# Altium PCB PCB_CONTROL.PcbDoc (part 14 of 15)
Units mil, origin at the board's own origin, x right, y up, seen from the top; angles counter-clockwise.
Board outline 7360.03 x 4773.15 mil, 2 copper layers (Top Layer, Bottom Layer); 73 components, 135 nets, 396 pads, 106 vias.
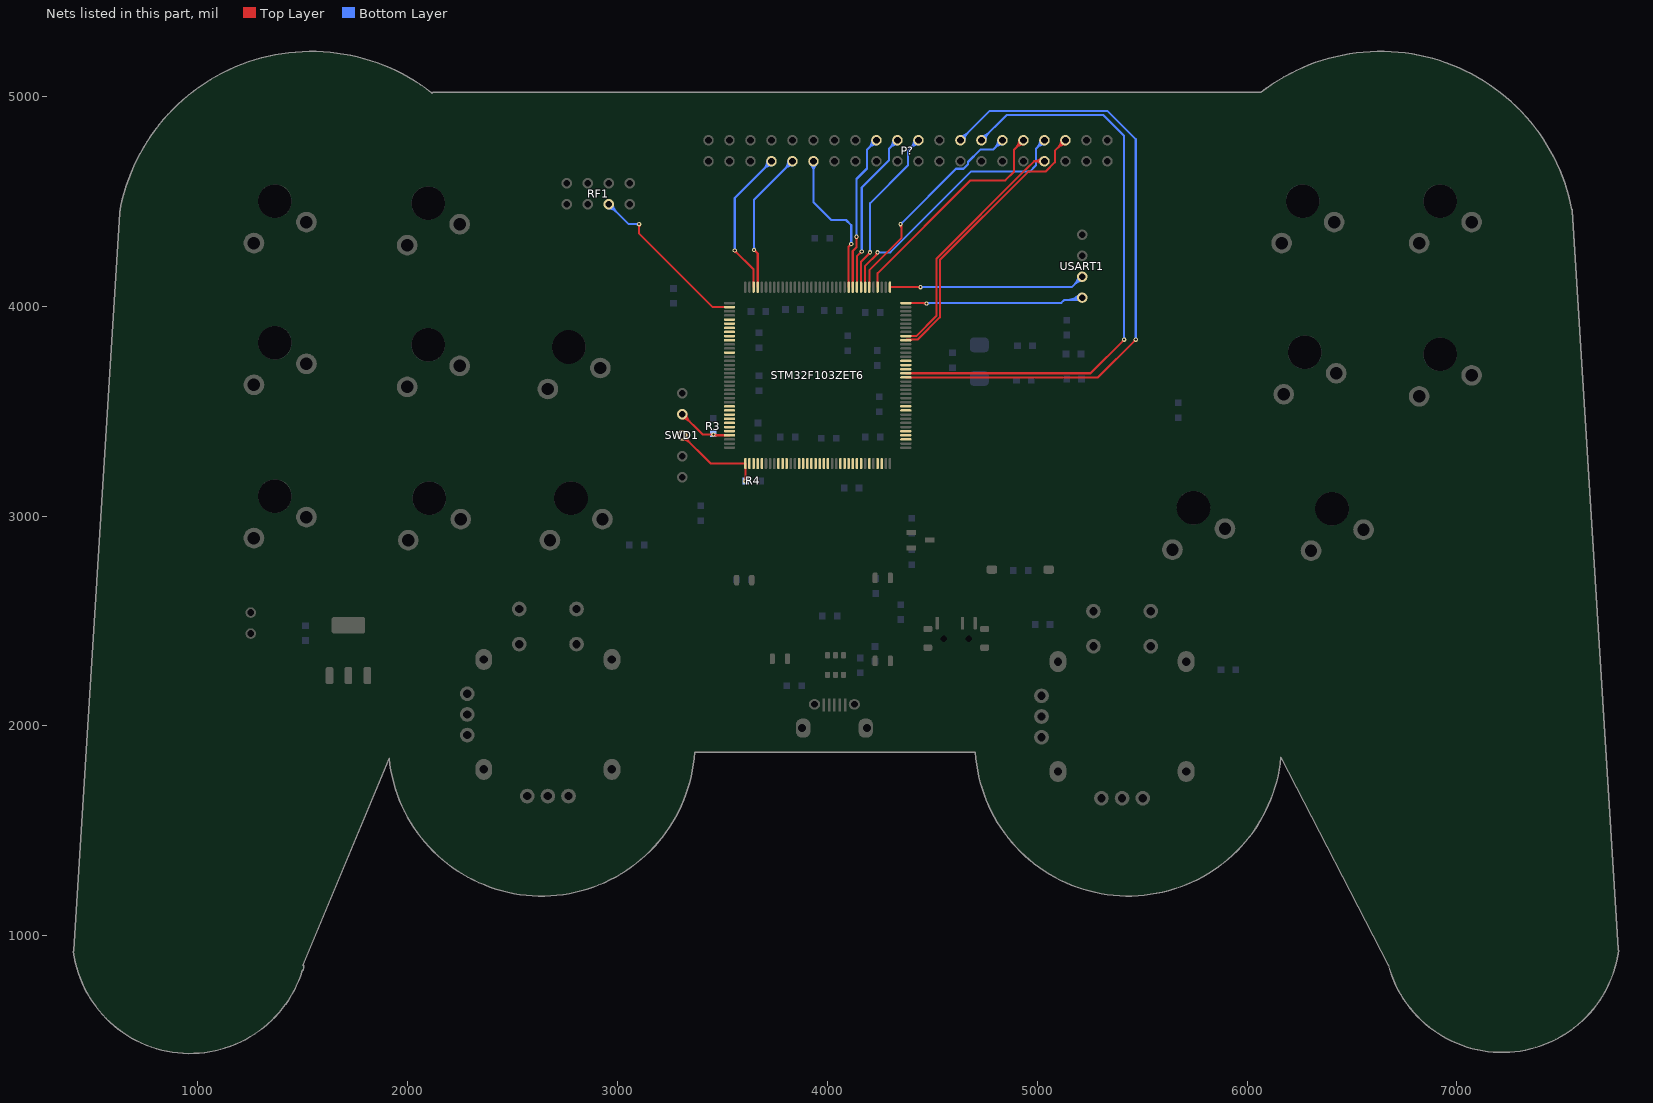
[diagram p14: the nets of this part, all layers, seen from the top]

## Via types
v1: diameter 20, hole 10, Top Layer to Bottom Layer, 104 vias
v2: diameter 30, hole 20, Top Layer to Bottom Layer, 2 vias

## Nets (pads, with @x,y where several pads share a name; then routed paths per layer and width w, separated by ;. In a path a pad name is that pad's centre, name@x,y a point inside that pad or via, vN(x,y) a via of type N, cw(c..) or ccw(c..) an arc to the next point about the centre after c; other vN are vias at no path point) (continued)
PA2: STM32F103ZET6.36 USART1.4 | length 2233.3
  Top Layer w10: STM32F103ZET6.36@4375,4014.49 v1@4471.51,4014.49 ; STM32F103ZET6.36@4396,4014.49 4432,4014.49 ; STM32F103ZET6.36@4396,4014.49 4432,4014.49 ; STM32F103ZET6.36@4396,4014.49 4432,4014.49 ; 4455.92,4014.49 cw(c4455.92,3993.92) v1@4470.46,4008.46 ; 4455.92,4014.49 cw(c4455.92,3993.92) v1@4470.46,4008.46 ; 4455.92,4014.49 cw(c4455.92,3993.92) v1@4470.46,4008.46 ; 4455.92,4014.49 cw(c4455.92,3993.92) v1@4470.46,4008.46 ; 4455.92,4014.49 cw(c4455.92,3993.92) v1@4470.46,4008.46 ; 4455.92,4014.49 cw(c4455.92,3993.92) v1@4470.46,4008.46 ; 4455.92,4014.49 cw(c4455.92,3993.92) v1@4470.46,4008.46 ; 4455.92,4014.49 cw(c4455.92,3993.92) v1@4470.46,4008.46
  Bottom Layer w10: v1@4470,4015 5115.3,4015 5128.3,4028 5203,4028 USART1.4@5215,4040 ; v1@4477.54,4008.46 cw(c4493.31,3992.69) 4493.31,4015 ; v1@4477.54,4008.46 cw(c4493.31,3992.69) 4493.31,4015 ; v1@4477.54,4008.46 cw(c4493.31,3992.69) 4493.31,4015 ; v1@4477.54,4008.46 cw(c4493.31,3992.69) 4493.31,4015 ; v1@4477.54,4008.46 cw(c4493.31,3992.69) 4493.31,4015 ; v1@4477.54,4008.46 cw(c4493.31,3992.69) 4493.31,4015 ; v1@4477.54,4008.46 cw(c4493.31,3992.69) 4493.31,4015 ; v1@4477.54,4008.46 cw(c4493.31,3992.69) 4493.31,4015 ; v1@4478.27,4014.6 ccw(c4482.59,4017.23) 4485.12,4012.85 ; v1@4478.27,4014.6 ccw(c4482.59,4017.23) 4485.12,4012.85 ; v1@4478.27,4014.6 ccw(c4482.59,4017.23) 4485.12,4012.85 ; v1@4478.27,4014.6 ccw(c4482.59,4017.23) 4485.12,4012.85 ; v1@4478.27,4014.6 ccw(c4482.59,4017.23) 4485.12,4012.85 ; v1@4478.27,4014.6 ccw(c4482.59,4017.23) 4485.12,4012.85 ; v1@4478.27,4014.6 ccw(c4482.59,4017.23) 4485.12,4012.85 ; v1@4478.27,4014.6 ccw(c4482.59,4017.23) 4485.12,4012.85 ; v1@4478.27,4014.6 ccw(c4482.59,4017.23) 4485.12,4012.85 ; v1@4478.27,4014.6 ccw(c4482.59,4017.23) 4485.12,4012.85 ; v1@4478.27,4014.6 ccw(c4482.59,4017.23) 4485.12,4012.85 ; v1@4478.27,4014.6 ccw(c4482.59,4017.23) 4485.12,4012.85 ; v1@4478.27,4014.6 ccw(c4482.59,4017.23) 4485.12,4012.85 ; v1@4478.27,4014.6 ccw(c4482.59,4017.23) 4485.12,4012.85 ; v1@4478.27,4014.6 ccw(c4482.59,4017.23) 4485.12,4012.85 ; v1@4478.27,4014.6 ccw(c4482.59,4017.23) 4485.12,4012.85 ; v1@4478.27,4014.6 ccw(c4482.59,4017.23) 4485.12,4012.85 ; v1@4478.27,4014.6 ccw(c4482.59,4017.23) 4485.12,4012.85 ; v1@4478.27,4014.6 ccw(c4482.59,4017.23) 4485.12,4012.85 ; v1@4478.27,4014.6 ccw(c4482.59,4017.23) 4485.12,4012.85 ; v1@4478.27,4014.6 ccw(c4482.59,4017.23) 4485.12,4012.85 ; v1@4478.27,4014.6 ccw(c4482.59,4017.23) 4485.12,4012.85 ; v1@4478.27,4014.6 ccw(c4482.59,4017.23) 4485.12,4012.85 ; v1@4478.27,4014.6 ccw(c4482.59,4017.23) 4485.12,4012.85 ; v1@4478.27,4014.6 ccw(c4482.59,4017.23) 4485.12,4012.85 ; v1@4478.27,4014.6 ccw(c4482.59,4017.23) 4485.12,4012.85 ; v1@4478.27,4014.6 ccw(c4482.59,4017.23) 4485.12,4012.85 ; v1@4478.27,4014.6 ccw(c4482.59,4017.23) 4485.12,4012.85 ; 5137.75,4028 ccw(c5137.75,4117.25) USART1.4@5200.86,4054.14 ; 5137.75,4028 ccw(c5137.75,4117.25) USART1.4@5200.86,4054.14 ; 5137.75,4028 ccw(c5137.75,4117.25) USART1.4@5200.86,4054.14 ; 5137.75,4028 ccw(c5137.75,4117.25) USART1.4@5200.86,4054.14 ; 5161.89,4028 ccw(c5161.89,4093.11) USART1.4@5207.93,4047.07 ; 5161.89,4028 ccw(c5161.89,4093.11) USART1.4@5207.93,4047.07 ; 5161.89,4028 ccw(c5161.89,4093.11) USART1.4@5207.93,4047.07 ; 5161.89,4028 ccw(c5161.89,4093.11) USART1.4@5207.93,4047.07 ; 5183.57,4033.01 cw(c5188.94,4023.71) USART1.4@5198.04,4029.4 ; 5183.57,4033.01 cw(c5188.94,4023.71) USART1.4@5198.04,4029.4 ; 5183.57,4033.01 cw(c5188.94,4023.71) USART1.4@5198.04,4029.4 ; 5183.57,4033.01 cw(c5188.94,4023.71) USART1.4@5198.04,4029.4 ; 5183.57,4033.01 cw(c5188.94,4023.71) USART1.4@5198.04,4029.4 ; 5183.57,4033.01 cw(c5188.94,4023.71) USART1.4@5198.04,4029.4 ; 5186.03,4028 ccw(c5186.03,4068.97) USART1.4@5215,4040 ; 5186.03,4028 ccw(c5186.03,4068.97) USART1.4@5215,4040 ; 5186.03,4028 ccw(c5186.03,4068.97) USART1.4@5215,4040 ; 5186.03,4028 ccw(c5186.03,4068.97) USART1.4@5215,4040 ; 5188.55,4035.88 ccw(c5180.9,4049.14) USART1.4@5195.68,4045.18 ; 5188.55,4035.88 ccw(c5180.9,4049.14) USART1.4@5195.68,4045.18 ; 5188.55,4035.88 ccw(c5180.9,4049.14) USART1.4@5195.68,4045.18 ; 5188.55,4035.88 ccw(c5180.9,4049.14) USART1.4@5195.68,4045.18 ; 5188.55,4035.88 ccw(c5180.9,4049.14) USART1.4@5195.68,4045.18 ; 5188.55,4035.88 ccw(c5180.9,4049.14) USART1.4@5195.68,4045.18
  other v1: 4474,4012
PA3: STM32F103ZET6.37 USART1.3 | length 1509.7
  Top Layer w10: STM32F103ZET6.37@4299.49,4090 v1(4445,4090) ; 4432.93,4090 cw(c4432.93,4077.93) v1@4441.46,4086.46 ; 4432.93,4090 ccw(c4432.93,4102.07) v1@4441.46,4093.54 ; 4432.93,4090 ccw(c4432.93,4102.07) v1@4441.46,4093.54 ; 4432.93,4090 cw(c4432.93,4077.93) v1@4441.46,4086.46 ; 4432.93,4090 ccw(c4432.93,4102.07) v1@4441.46,4093.54 ; 4432.93,4090 cw(c4432.93,4077.93) v1@4441.46,4086.46
  Bottom Layer w10: v1(4445,4090) 5165,4090 USART1.3@5215,4140 ; v1@4448.54,4086.46 cw(c4457.07,4077.93) 4457.07,4090 ; v1@4448.54,4086.46 cw(c4457.07,4077.93) 4457.07,4090 ; v1@4448.54,4086.46 cw(c4457.07,4077.93) 4457.07,4090 ; v1@4448.54,4093.54 ccw(c4457.07,4102.07) 4457.07,4090 ; v1@4448.54,4093.54 ccw(c4457.07,4102.07) 4457.07,4090 ; v1@4448.54,4093.54 ccw(c4457.07,4102.07) 4457.07,4090 ; 5180.86,4105.86 cw(c5215,4071.72) USART1.3@5215,4120 ; 5180.86,4105.86 ccw(c5146.72,4140) USART1.3@5195,4140 ; 5180.86,4105.86 ccw(c5146.72,4140) USART1.3@5195,4140 ; 5180.86,4105.86 cw(c5215,4071.72) USART1.3@5215,4120 ; 5180.86,4105.86 ccw(c5146.72,4140) USART1.3@5195,4140 ; 5180.86,4105.86 cw(c5215,4071.72) USART1.3@5215,4120 ; 5188.25,4114.8 cw(c5222.01,4105.76) USART1.3@5215,4140 ; 5188.25,4114.8 cw(c5222.01,4105.76) USART1.3@5215,4140 ; 5188.25,4114.8 cw(c5222.01,4105.76) USART1.3@5215,4140 ; 5189.8,4113.25 ccw(c5180.76,4147.01) USART1.3@5215,4140 ; 5189.8,4113.25 ccw(c5180.76,4147.01) USART1.3@5215,4140 ; 5189.8,4113.25 ccw(c5180.76,4147.01) USART1.3@5215,4140
PA4: P?.32 STM32F103ZET6.40 | length 1852.6
  Top Layer w10: STM32F103ZET6.40@4240.43,4090 4240.43,4156.31 4683.12,4599 4849,4599 4890,4640 4890,4745 P?.32@4935,4790 ; 4900.86,4755.86 cw(c4935,4721.72) P?.32@4935,4770 ; 4900.86,4755.86 ccw(c4866.72,4790) P?.32@4915,4790 ; 4900.86,4755.86 ccw(c4866.72,4790) P?.32@4915,4790 ; 4900.86,4755.86 cw(c4935,4721.72) P?.32@4935,4770 ; 4900.86,4755.86 ccw(c4866.72,4790) P?.32@4915,4790 ; 4900.86,4755.86 cw(c4935,4721.72) P?.32@4935,4770 ; 4900.86,4755.86 ccw(c4866.72,4790) P?.32@4915,4790 ; 4900.86,4755.86 cw(c4935,4721.72) P?.32@4935,4770 ; 4908.25,4764.8 cw(c4942.01,4755.76) P?.32@4935,4790 ; 4908.25,4764.8 cw(c4942.01,4755.76) P?.32@4935,4790 ; 4908.25,4764.8 cw(c4942.01,4755.76) P?.32@4935,4790 ; 4908.25,4764.8 cw(c4942.01,4755.76) P?.32@4935,4790 ; 4908.25,4764.8 cw(c4942.01,4755.76) P?.32@4935,4790 ; 4908.25,4764.8 cw(c4942.01,4755.76) P?.32@4935,4790 ; 4909.8,4763.25 ccw(c4900.76,4797.01) P?.32@4935,4790 ; 4909.8,4763.25 ccw(c4900.76,4797.01) P?.32@4935,4790 ; 4909.8,4763.25 ccw(c4900.76,4797.01) P?.32@4935,4790 ; 4909.8,4763.25 ccw(c4900.76,4797.01) P?.32@4935,4790 ; 4909.8,4763.25 ccw(c4900.76,4797.01) P?.32@4935,4790 ; 4909.8,4763.25 ccw(c4900.76,4797.01) P?.32@4935,4790
PA6: P?.30 STM32F103ZET6.42 | length 2028
  Top Layer w10: STM32F103ZET6.42@4201.06,4090 4201.06,4171.06 4355,4325 4355,4385 v1(4350,4390) ; v1@4346.46,4386.46 cw(c4325.86,4365.86) 4355,4365.86 ; v1@4346.46,4386.46 cw(c4325.86,4365.86) 4355,4365.86 ; v1@4346.46,4386.46 cw(c4325.86,4365.86) 4355,4365.86 ; v1@4346.46,4386.46 cw(c4325.86,4365.86) 4355,4365.86 ; 4352.61,4375.82 cw(c4360.68,4380.47) v1@4353.73,4386.67 ; 4352.61,4375.82 cw(c4360.68,4380.47) v1@4353.73,4386.67 ; 4352.61,4375.82 cw(c4360.68,4380.47) v1@4353.73,4386.67 ; 4352.61,4375.82 cw(c4360.68,4380.47) v1@4353.73,4386.67 ; 4352.61,4375.82 cw(c4360.68,4380.47) v1@4353.73,4386.67 ; 4352.61,4375.82 cw(c4360.68,4380.47) v1@4353.73,4386.67
  Bottom Layer w10: v1(4350,4390) 4614,4654 4649.91,4654 4671,4675.09 4671,4686 4730,4745 4790,4745 P?.30@4835,4790 ; v1@4350,4395 ccw(c4350,4407.07) 4358.54,4398.54 ; v1@4350,4395 ccw(c4350,4407.07) 4358.54,4398.54 ; v1@4350,4395 ccw(c4350,4407.07) 4358.54,4398.54 ; v1@4350,4395 ccw(c4350,4407.07) 4358.54,4398.54 ; v1@4355,4390 cw(c4367.07,4390) 4358.54,4398.54 ; v1@4355,4390 cw(c4367.07,4390) 4358.54,4398.54 ; v1@4355,4390 cw(c4367.07,4390) 4358.54,4398.54 ; v1@4355,4390 cw(c4367.07,4390) 4358.54,4398.54 ; 4800.86,4755.86 cw(c4835,4721.72) P?.30@4835,4770 ; 4800.86,4755.86 ccw(c4766.72,4790) P?.30@4815,4790 ; 4800.86,4755.86 ccw(c4766.72,4790) P?.30@4815,4790 ; 4800.86,4755.86 cw(c4835,4721.72) P?.30@4835,4770 ; 4800.86,4755.86 ccw(c4766.72,4790) P?.30@4815,4790 ; 4800.86,4755.86 cw(c4835,4721.72) P?.30@4835,4770 ; 4800.86,4755.86 ccw(c4766.72,4790) P?.30@4815,4790 ; 4800.86,4755.86 cw(c4835,4721.72) P?.30@4835,4770 ; 4808.25,4764.8 cw(c4842.01,4755.76) P?.30@4835,4790 ; 4808.25,4764.8 cw(c4842.01,4755.76) P?.30@4835,4790 ; 4808.25,4764.8 cw(c4842.01,4755.76) P?.30@4835,4790 ; 4808.25,4764.8 cw(c4842.01,4755.76) P?.30@4835,4790 ; 4808.25,4764.8 cw(c4842.01,4755.76) P?.30@4835,4790 ; 4808.25,4764.8 cw(c4842.01,4755.76) P?.30@4835,4790 ; 4809.8,4763.25 ccw(c4800.76,4797.01) P?.30@4835,4790 ; 4809.8,4763.25 ccw(c4800.76,4797.01) P?.30@4835,4790 ; 4809.8,4763.25 ccw(c4800.76,4797.01) P?.30@4835,4790 ; 4809.8,4763.25 ccw(c4800.76,4797.01) P?.30@4835,4790 ; 4809.8,4763.25 ccw(c4800.76,4797.01) P?.30@4835,4790 ; 4809.8,4763.25 ccw(c4800.76,4797.01) P?.30@4835,4790
PA7: P?.34 STM32F103ZET6.43 | length 2180.3
  Top Layer w10: STM32F103ZET6.43@4181.38,4090 4181.38,4191.38 4240,4250 v1(4240,4256) ; 4227.22,4237.22 ccw(c4208.44,4256) v1@4235,4256 ; 4227.22,4237.22 ccw(c4208.44,4256) v1@4235,4256 ; 4227.22,4237.22 ccw(c4208.44,4256) v1@4235,4256 ; 4227.22,4237.22 ccw(c4208.44,4256) v1@4235,4256
  Bottom Layer w10: v1(4240,4256) 4301,4256 4685,4640 4965,4640 4995,4670 4995,4750 P?.34@5035,4790 ; v1@4243.54,4252.46 cw(c4252.07,4243.93) 4252.07,4256 ; v1@4243.54,4252.46 cw(c4252.07,4243.93) 4252.07,4256 ; v1@4243.54,4252.46 cw(c4252.07,4243.93) 4252.07,4256 ; v1@4243.54,4252.46 cw(c4252.07,4243.93) 4252.07,4256 ; v1@4243.54,4259.54 ccw(c4252.07,4268.07) 4252.07,4256 ; v1@4243.54,4259.54 ccw(c4252.07,4268.07) 4252.07,4256 ; v1@4243.54,4259.54 ccw(c4252.07,4268.07) 4252.07,4256 ; v1@4243.54,4259.54 ccw(c4252.07,4268.07) 4252.07,4256 ; 5000.86,4755.86 cw(c5035,4721.72) P?.34@5035,4770 ; 5000.86,4755.86 ccw(c4966.72,4790) P?.34@5015,4790 ; 5000.86,4755.86 ccw(c4966.72,4790) P?.34@5015,4790 ; 5000.86,4755.86 cw(c5035,4721.72) P?.34@5035,4770 ; 5000.86,4755.86 ccw(c4966.72,4790) P?.34@5015,4790 ; 5000.86,4755.86 cw(c5035,4721.72) P?.34@5035,4770 ; 5000.86,4755.86 ccw(c4966.72,4790) P?.34@5015,4790 ; 5000.86,4755.86 cw(c5035,4721.72) P?.34@5035,4770 ; 5008.25,4764.8 cw(c5042.01,4755.76) P?.34@5035,4790 ; 5008.25,4764.8 cw(c5042.01,4755.76) P?.34@5035,4790 ; 5008.25,4764.8 cw(c5042.01,4755.76) P?.34@5035,4790 ; 5008.25,4764.8 cw(c5042.01,4755.76) P?.34@5035,4790 ; 5008.25,4764.8 cw(c5042.01,4755.76) P?.34@5035,4790 ; 5008.25,4764.8 cw(c5042.01,4755.76) P?.34@5035,4790 ; 5009.8,4763.25 ccw(c5000.76,4797.01) P?.34@5035,4790 ; 5009.8,4763.25 ccw(c5000.76,4797.01) P?.34@5035,4790 ; 5009.8,4763.25 ccw(c5000.76,4797.01) P?.34@5035,4790 ; 5009.8,4763.25 ccw(c5000.76,4797.01) P?.34@5035,4790 ; 5009.8,4763.25 ccw(c5000.76,4797.01) P?.34@5035,4790 ; 5009.8,4763.25 ccw(c5000.76,4797.01) P?.34@5035,4790
PA8: STM32F103ZET6.100
PA9: STM32F103ZET6.101
PA10: STM32F103ZET6.102
PA11: STM32F103ZET6.103
PA12: STM32F103ZET6.104
PA13: R3.1 STM32F103ZET6.105 SWD1.2 | length 4338
  Top Layer w10: v1@3461.43,3384.57 STM32F103ZET6.105@3535,3384.57 ; SWD1.2@3310,3465 cw(c3310,3416.72) 3344.14,3450.86 ; SWD1.2@3310,3465 cw(c3310,3416.72) 3344.14,3450.86 ; SWD1.2@3310,3465 cw(c3310,3416.72) 3344.14,3450.86 ; SWD1.2@3310,3465 cw(c3310,3416.72) 3344.14,3450.86 ; SWD1.2@3310,3465 cw(c3310,3416.72) 3344.14,3450.86 ; SWD1.2@3310,3465 cw(c3310,3416.72) 3344.14,3450.86 ; SWD1.2@3310,3465 cw(c3310,3416.72) 3344.14,3450.86 ; SWD1.2@3310,3465 cw(c3310,3416.72) 3344.14,3450.86 ; SWD1.2@3310,3485 ccw(c3344.24,3492.01) 3335.2,3458.25 ; SWD1.2@3310,3485 cw(c3302.99,3450.76) 3336.75,3459.8 ; SWD1.2@3310,3485 ccw(c3344.24,3492.01) 3335.2,3458.25 ; SWD1.2@3310,3485 cw(c3302.99,3450.76) 3336.75,3459.8 ; SWD1.2@3310,3485 ccw(c3344.24,3492.01) 3335.2,3458.25 ; SWD1.2@3310,3485 cw(c3302.99,3450.76) 3336.75,3459.8 ; SWD1.2@3310,3485 ccw(c3344.24,3492.01) 3335.2,3458.25 ; SWD1.2@3310,3485 cw(c3302.99,3450.76) 3336.75,3459.8 ; SWD1.2@3310,3485 ccw(c3344.24,3492.01) 3335.2,3458.25 ; SWD1.2@3310,3485 cw(c3302.99,3450.76) 3336.75,3459.8 ; SWD1.2@3310,3485 ccw(c3344.24,3492.01) 3335.2,3458.25 ; SWD1.2@3310,3485 cw(c3302.99,3450.76) 3336.75,3459.8 ; SWD1.2@3310,3485 ccw(c3344.24,3492.01) 3335.2,3458.25 ; SWD1.2@3310,3485 cw(c3302.99,3450.76) 3336.75,3459.8 ; SWD1.2@3310,3485 ccw(c3344.24,3492.01) 3335.2,3458.25 ; SWD1.2@3310,3485 cw(c3302.99,3450.76) 3336.75,3459.8 ; SWD1.2@3310,3485 ccw(c3344.24,3492.01) 3335.2,3458.25 ; SWD1.2@3310,3485 cw(c3302.99,3450.76) 3336.75,3459.8 ; SWD1.2@3310,3485 ccw(c3344.24,3492.01) 3335.2,3458.25 ; SWD1.2@3310,3485 cw(c3302.99,3450.76) 3336.75,3459.8 ; SWD1.2@3310,3485 ccw(c3344.24,3492.01) 3335.2,3458.25 ; SWD1.2@3310,3485 cw(c3302.99,3450.76) 3336.75,3459.8 ; SWD1.2@3310,3485 ccw(c3344.24,3492.01) 3335.2,3458.25 ; SWD1.2@3310,3485 cw(c3302.99,3450.76) 3336.75,3459.8 ; SWD1.2@3310,3485 ccw(c3344.24,3492.01) 3335.2,3458.25 ; SWD1.2@3310,3485 cw(c3302.99,3450.76) 3336.75,3459.8 ; SWD1.2@3310,3485 ccw(c3344.24,3492.01) 3335.2,3458.25 ; SWD1.2@3310,3485 cw(c3302.99,3450.76) 3336.75,3459.8 ; SWD1.2@3310,3485 ccw(c3344.24,3492.01) 3335.2,3458.25 ; SWD1.2@3310,3485 cw(c3302.99,3450.76) 3336.75,3459.8 ; SWD1.2@3310,3485 ccw(c3344.24,3492.01) 3335.2,3458.25 ; SWD1.2@3310,3485 cw(c3302.99,3450.76) 3336.75,3459.8 ; SWD1.2@3310,3485 ccw(c3344.24,3492.01) 3335.2,3458.25 ; SWD1.2@3310,3485 cw(c3302.99,3450.76) 3336.75,3459.8 ; SWD1.2@3310,3485 ccw(c3344.24,3492.01) 3335.2,3458.25 ; SWD1.2@3310,3485 cw(c3302.99,3450.76) 3336.75,3459.8 ; SWD1.2@3310,3485 ccw(c3344.24,3492.01) 3335.2,3458.25 ; SWD1.2@3310,3485 cw(c3302.99,3450.76) 3336.75,3459.8 ; SWD1.2@3310,3485 ccw(c3344.24,3492.01) 3335.2,3458.25 ; SWD1.2@3310,3485 cw(c3302.99,3450.76) 3336.75,3459.8 ; SWD1.2@3310,3485 ccw(c3344.24,3492.01) 3335.2,3458.25 ; SWD1.2@3310,3485 cw(c3302.99,3450.76) 3336.75,3459.8 ; SWD1.2@3310,3485 ccw(c3344.24,3492.01) 3335.2,3458.25 ; SWD1.2@3310,3485 cw(c3302.99,3450.76) 3336.75,3459.8 ; SWD1.2@3310,3485 ccw(c3344.24,3492.01) 3335.2,3458.25 ; SWD1.2@3310,3485 cw(c3302.99,3450.76) 3336.75,3459.8 ; SWD1.2@3310,3485 ccw(c3344.24,3492.01) 3335.2,3458.25 ; SWD1.2@3310,3485 cw(c3302.99,3450.76) 3336.75,3459.8 ; SWD1.2@3310,3485 ccw(c3344.24,3492.01) 3335.2,3458.25 ; SWD1.2@3310,3485 cw(c3302.99,3450.76) 3336.75,3459.8 ; SWD1.2@3310,3485 ccw(c3344.24,3492.01) 3335.2,3458.25 ; SWD1.2@3310,3485 cw(c3302.99,3450.76) 3336.75,3459.8 ; SWD1.2@3310,3485 ccw(c3344.24,3492.01) 3335.2,3458.25 ; SWD1.2@3310,3485 cw(c3302.99,3450.76) 3336.75,3459.8 ; SWD1.2@3310,3485 ccw(c3344.24,3492.01) 3335.2,3458.25 ; SWD1.2@3310,3485 cw(c3302.99,3450.76) 3336.75,3459.8 ; SWD1.2@3310,3485 3407,3388 v1(3458,3388) ; SWD1.2@3330,3485 ccw(c3378.28,3485) 3344.14,3450.86 ; SWD1.2@3330,3485 ccw(c3378.28,3485) 3344.14,3450.86 ; SWD1.2@3330,3485 ccw(c3378.28,3485) 3344.14,3450.86 ; SWD1.2@3330,3485 ccw(c3378.28,3485) 3344.14,3450.86 ; SWD1.2@3330,3485 ccw(c3378.28,3485) 3344.14,3450.86 ; SWD1.2@3330,3485 ccw(c3378.28,3485) 3344.14,3450.86 ; SWD1.2@3330,3485 ccw(c3378.28,3485) 3344.14,3450.86 ; SWD1.2@3330,3485 ccw(c3378.28,3485) 3344.14,3450.86 ; 3418,3388 v1(3458,3388) ; 3418,3388 v1(3458,3388) ; 3418,3388 v1(3458,3388) ; 3445.93,3388 cw(c3445.93,3375.93) v1@3454.46,3384.46 ; 3445.93,3388 ccw(c3445.93,3400.07) v1@3454.46,3391.54 ; 3445.93,3388 cw(c3445.93,3375.93) v1@3454.46,3384.46 ; 3445.93,3388 ccw(c3445.93,3400.07) v1@3454.46,3391.54 ; 3445.93,3388 cw(c3445.93,3375.93) v1@3454.46,3384.46 ; 3445.93,3388 ccw(c3445.93,3400.07) v1@3454.46,3391.54 ; 3445.93,3388 cw(c3445.93,3375.93) v1@3454.46,3384.46 ; 3445.93,3388 ccw(c3445.93,3400.07) v1@3454.46,3391.54 ; 3445.93,3388 ccw(c3445.93,3400.07) v1@3454.46,3391.54 ; 3445.93,3388 cw(c3445.93,3375.93) v1@3454.46,3384.46 ; 3445.93,3388 ccw(c3445.93,3400.07) v1@3454.46,3391.54 ; 3445.93,3388 cw(c3445.93,3375.93) v1@3454.46,3384.46 ; 3445.93,3388 ccw(c3445.93,3400.07) v1@3454.46,3391.54 ; 3445.93,3388 cw(c3445.93,3375.93) v1@3454.46,3384.46 ; 3445.93,3388 ccw(c3445.93,3400.07) v1@3454.46,3391.54 ; 3445.93,3388 cw(c3445.93,3375.93) v1@3454.46,3384.46 ; 3445.93,3388 ccw(c3445.93,3400.07) v1@3454.46,3391.54 ; 3445.93,3388 cw(c3445.93,3375.93) v1@3454.46,3384.46 ; 3445.93,3388 ccw(c3445.93,3400.07) v1@3454.46,3391.54 ; 3445.93,3388 cw(c3445.93,3375.93) v1@3454.46,3384.46 ; 3445.93,3388 ccw(c3445.93,3400.07) v1@3454.46,3391.54 ; 3445.93,3388 cw(c3445.93,3375.93) v1@3454.46,3384.46 ; 3445.93,3388 ccw(c3445.93,3400.07) v1@3454.46,3391.54 ; 3445.93,3388 cw(c3445.93,3375.93) v1@3454.46,3384.46 ; 3445.93,3388 ccw(c3445.93,3400.07) v1@3454.46,3391.54 ; 3445.93,3388 cw(c3445.93,3375.93) v1@3454.46,3384.46 ; 3445.93,3388 ccw(c3445.93,3400.07) v1@3454.46,3391.54 ; 3445.93,3388 cw(c3445.93,3375.93) v1@3454.46,3384.46 ; 3445.93,3388 ccw(c3445.93,3400.07) v1@3454.46,3391.54 ; 3445.93,3388 cw(c3445.93,3375.93) v1@3454.46,3384.46 ; 3445.93,3388 ccw(c3445.93,3400.07) v1@3454.46,3391.54 ; 3445.93,3388 cw(c3445.93,3375.93) v1@3454.46,3384.46 ; 3445.93,3388 ccw(c3445.93,3400.07) v1@3454.46,3391.54 ; 3445.93,3388 cw(c3445.93,3375.93) v1@3454.46,3384.46 ; 3445.93,3388 ccw(c3445.93,3400.07) v1@3454.46,3391.54 ; 3445.93,3388 cw(c3445.93,3375.93) v1@3454.46,3384.46 ; 3445.93,3388 ccw(c3445.93,3400.07) v1@3454.46,3391.54 ; 3445.93,3388 cw(c3445.93,3375.93) v1@3454.46,3384.46 ; 3445.93,3388 ccw(c3445.93,3400.07) v1@3454.46,3391.54 ; 3445.93,3388 cw(c3445.93,3375.93) v1@3454.46,3384.46 ; 3445.93,3388 ccw(c3445.93,3400.07) v1@3454.46,3391.54 ; 3445.93,3388 cw(c3445.93,3375.93) v1@3454.46,3384.46 ; 3445.93,3388 ccw(c3445.93,3400.07) v1@3454.46,3391.54 ; 3445.93,3388 cw(c3445.93,3375.93) v1@3454.46,3384.46 ; 3445.93,3388 ccw(c3445.93,3400.07) v1@3454.46,3391.54 ; 3445.93,3388 cw(c3445.93,3375.93) v1@3454.46,3384.46 ; 3445.93,3388 ccw(c3445.93,3400.07) v1@3454.46,3391.54 ; 3445.93,3388 cw(c3445.93,3375.93) v1@3454.46,3384.46 ; 3445.93,3388 ccw(c3445.93,3400.07) v1@3454.46,3391.54 ; 3445.93,3388 cw(c3445.93,3375.93) v1@3454.46,3384.46 ; 3445.93,3388 ccw(c3445.93,3400.07) v1@3454.46,3391.54 ; 3445.93,3388 cw(c3445.93,3375.93) v1@3454.46,3384.46 ; 3445.93,3388 ccw(c3445.93,3400.07) v1@3454.46,3391.54 ; 3445.93,3388 cw(c3445.93,3375.93) v1@3454.46,3384.46 ; 3445.93,3388 ccw(c3445.93,3400.07) v1@3454.46,3391.54 ; 3445.93,3388 cw(c3445.93,3375.93) v1@3454.46,3384.46 ; 3445.93,3388 ccw(c3445.93,3400.07) v1@3454.46,3391.54 ; 3445.93,3388 cw(c3445.93,3375.93) v1@3454.46,3384.46 ; 3445.93,3388 ccw(c3445.93,3400.07) v1@3454.46,3391.54 ; 3445.93,3388 cw(c3445.93,3375.93) v1@3454.46,3384.46 ; 3445.93,3388 ccw(c3445.93,3400.07) v1@3454.46,3391.54 ; 3445.93,3388 cw(c3445.93,3375.93) v1@3454.46,3384.46 ; 3445.93,3388 ccw(c3445.93,3400.07) v1@3454.46,3391.54 ; 3445.93,3388 cw(c3445.93,3375.93) v1@3454.46,3384.46 ; 3445.93,3388 ccw(c3445.93,3400.07) v1@3454.46,3391.54 ; 3445.93,3388 cw(c3445.93,3375.93) v1@3454.46,3384.46 ; 3445.93,3388 ccw(c3445.93,3400.07) v1@3454.46,3391.54 ; 3445.93,3388 cw(c3445.93,3375.93) v1@3454.46,3384.46 ; 3445.93,3388 ccw(c3445.93,3400.07) v1@3454.46,3391.54 ; 3445.93,3388 cw(c3445.93,3375.93) v1@3454.46,3384.46 ; 3445.93,3388 ccw(c3445.93,3400.07) v1@3454.46,3391.54 ; 3445.93,3388 cw(c3445.93,3375.93) v1@3454.46,3384.46 ; v1@3461.54,3391.54 ccw(c3478.36,3408.36) 3478.36,3384.57 ; v1@3461.54,3391.54 ccw(c3478.36,3408.36) 3478.36,3384.57 ; v1@3461.54,3391.54 ccw(c3478.36,3408.36) 3478.36,3384.57 ; v1@3461.54,3391.54 ccw(c3478.36,3408.36) 3478.36,3384.57 ; v1@3461.54,3391.54 ccw(c3478.36,3408.36) 3478.36,3384.57 ; v1@3461.54,3391.54 ccw(c3478.36,3408.36) 3478.36,3384.57 ; v1@3461.54,3391.54 ccw(c3478.36,3408.36) 3478.36,3384.57 ; v1@3461.54,3391.54 ccw(c3478.36,3408.36) 3478.36,3384.57 ; v1@3462.07,3385.1 cw(c3466.85,3381.69) 3469.79,3386.77 ; v1@3462.07,3385.1 cw(c3466.85,3381.69) 3469.79,3386.77 ; v1@3462.07,3385.1 cw(c3466.85,3381.69) 3469.79,3386.77 ; v1@3462.07,3385.1 cw(c3466.85,3381.69) 3469.79,3386.77 ; v1@3462.07,3385.1 cw(c3466.85,3381.69) 3469.79,3386.77 ; v1@3462.07,3385.1 cw(c3466.85,3381.69) 3469.79,3386.77 ; v1@3462.07,3385.1 cw(c3466.85,3381.69) 3469.79,3386.77 ; v1@3462.07,3385.1 cw(c3466.85,3381.69) 3469.79,3386.77 ; v1@3462.07,3385.1 cw(c3466.85,3381.69) 3469.79,3386.77 ; v1@3462.07,3385.1 cw(c3466.85,3381.69) 3469.79,3386.77 ; v1@3462.07,3385.1 cw(c3466.85,3381.69) 3469.79,3386.77 ; v1@3462.07,3385.1 cw(c3466.85,3381.69) 3469.79,3386.77 ; v1@3462.07,3385.1 cw(c3466.85,3381.69) 3469.79,3386.77 ; v1@3462.07,3385.1 cw(c3466.85,3381.69) 3469.79,3386.77 ; v1@3462.07,3385.1 cw(c3466.85,3381.69) 3469.79,3386.77 ; v1@3462.07,3385.1 cw(c3466.85,3381.69) 3469.79,3386.77 ; v1@3462.07,3385.1 cw(c3466.85,3381.69) 3469.79,3386.77 ; v1@3462.07,3385.1 cw(c3466.85,3381.69) 3469.79,3386.77 ; v1@3462.07,3385.1 cw(c3466.85,3381.69) 3469.79,3386.77 ; v1@3462.07,3385.1 cw(c3466.85,3381.69) 3469.79,3386.77 ; v1@3462.07,3385.1 cw(c3466.85,3381.69) 3469.79,3386.77 ; v1@3462.07,3385.1 cw(c3466.85,3381.69) 3469.79,3386.77 ; v1@3462.07,3385.1 cw(c3466.85,3381.69) 3469.79,3386.77 ; v1@3462.07,3385.1 cw(c3466.85,3381.69) 3469.79,3386.77 ; v1@3462.07,3385.1 cw(c3466.85,3381.69) 3469.79,3386.77 ; v1@3462.07,3385.1 cw(c3466.85,3381.69) 3469.79,3386.77 ; v1@3462.07,3385.1 cw(c3466.85,3381.69) 3469.79,3386.77 ; v1@3462.07,3385.1 cw(c3466.85,3381.69) 3469.79,3386.77 ; 3478,3384.57 STM32F103ZET6.105@3514,3384.57 ; 3478,3384.57 STM32F103ZET6.105@3514,3384.57 ; 3478,3384.57 STM32F103ZET6.105@3514,3384.57
PA14: R4.1 STM32F103ZET6.109 SWD1.3 | length 3233.6
  Top Layer w10: v1@3606.98,3169.05 ccw(c3598.44,3177.58) 3610.51,3177.58 ccw(c3622.58,3177.58) v1@3614.05,3169.05 ; v1(3610.51,3165.51) STM32F103ZET6.109@3610.51,3250 3445,3250 SWD1.3@3310,3385 ; SWD1.3@3310,3365 cw(c3310,3316.72) 3344.14,3350.86 ; SWD1.3@3310,3365 cw(c3310,3316.72) 3344.14,3350.86 ; SWD1.3@3310,3365 cw(c3310,3316.72) 3344.14,3350.86 ; SWD1.3@3310,3365 cw(c3310,3316.72) 3344.14,3350.86 ; SWD1.3@3310,3365 cw(c3310,3316.72) 3344.14,3350.86 ; SWD1.3@3310,3365 cw(c3310,3316.72) 3344.14,3350.86 ; SWD1.3@3310,3365 cw(c3310,3316.72) 3344.14,3350.86 ; SWD1.3@3310,3365 cw(c3310,3316.72) 3344.14,3350.86 ; SWD1.3@3310,3385 ccw(c3344.24,3392.01) 3335.2,3358.25 ; SWD1.3@3310,3385 cw(c3302.99,3350.76) 3336.75,3359.8 ; SWD1.3@3310,3385 ccw(c3344.24,3392.01) 3335.2,3358.25 ; SWD1.3@3310,3385 cw(c3302.99,3350.76) 3336.75,3359.8 ; SWD1.3@3310,3385 ccw(c3344.24,3392.01) 3335.2,3358.25 ; SWD1.3@3310,3385 cw(c3302.99,3350.76) 3336.75,3359.8 ; SWD1.3@3310,3385 ccw(c3344.24,3392.01) 3335.2,3358.25 ; SWD1.3@3310,3385 cw(c3302.99,3350.76) 3336.75,3359.8 ; SWD1.3@3310,3385 ccw(c3344.24,3392.01) 3335.2,3358.25 ; SWD1.3@3310,3385 cw(c3302.99,3350.76) 3336.75,3359.8 ; SWD1.3@3310,3385 ccw(c3344.24,3392.01) 3335.2,3358.25 ; SWD1.3@3310,3385 cw(c3302.99,3350.76) 3336.75,3359.8 ; SWD1.3@3310,3385 ccw(c3344.24,3392.01) 3335.2,3358.25 ; SWD1.3@3310,3385 cw(c3302.99,3350.76) 3336.75,3359.8 ; SWD1.3@3310,3385 ccw(c3344.24,3392.01) 3335.2,3358.25 ; SWD1.3@3310,3385 cw(c3302.99,3350.76) 3336.75,3359.8 ; SWD1.3@3310,3385 ccw(c3344.24,3392.01) 3335.2,3358.25 ; SWD1.3@3310,3385 cw(c3302.99,3350.76) 3336.75,3359.8 ; SWD1.3@3310,3385 ccw(c3344.24,3392.01) 3335.2,3358.25 ; SWD1.3@3310,3385 cw(c3302.99,3350.76) 3336.75,3359.8 ; SWD1.3@3310,3385 ccw(c3344.24,3392.01) 3335.2,3358.25 ; SWD1.3@3310,3385 cw(c3302.99,3350.76) 3336.75,3359.8 ; SWD1.3@3310,3385 ccw(c3344.24,3392.01) 3335.2,3358.25 ; SWD1.3@3310,3385 cw(c3302.99,3350.76) 3336.75,3359.8 ; SWD1.3@3310,3385 ccw(c3344.24,3392.01) 3335.2,3358.25 ; SWD1.3@3310,3385 cw(c3302.99,3350.76) 3336.75,3359.8 ; SWD1.3@3310,3385 ccw(c3344.24,3392.01) 3335.2,3358.25 ; SWD1.3@3310,3385 cw(c3302.99,3350.76) 3336.75,3359.8 ; SWD1.3@3310,3385 ccw(c3344.24,3392.01) 3335.2,3358.25 ; SWD1.3@3310,3385 cw(c3302.99,3350.76) 3336.75,3359.8 ; SWD1.3@3310,3385 ccw(c3344.24,3392.01) 3335.2,3358.25 ; SWD1.3@3310,3385 cw(c3302.99,3350.76) 3336.75,3359.8 ; SWD1.3@3310,3385 ccw(c3344.24,3392.01) 3335.2,3358.25 ; SWD1.3@3310,3385 cw(c3302.99,3350.76) 3336.75,3359.8 ; SWD1.3@3310,3385 ccw(c3344.24,3392.01) 3335.2,3358.25 ; SWD1.3@3310,3385 cw(c3302.99,3350.76) 3336.75,3359.8 ; SWD1.3@3310,3385 ccw(c3344.24,3392.01) 3335.2,3358.25 ; SWD1.3@3310,3385 cw(c3302.99,3350.76) 3336.75,3359.8 ; SWD1.3@3310,3385 ccw(c3344.24,3392.01) 3335.2,3358.25 ; SWD1.3@3310,3385 cw(c3302.99,3350.76) 3336.75,3359.8 ; SWD1.3@3310,3385 ccw(c3344.24,3392.01) 3335.2,3358.25 ; SWD1.3@3310,3385 cw(c3302.99,3350.76) 3336.75,3359.8 ; SWD1.3@3310,3385 ccw(c3344.24,3392.01) 3335.2,3358.25 ; SWD1.3@3310,3385 cw(c3302.99,3350.76) 3336.75,3359.8 ; SWD1.3@3310,3385 ccw(c3344.24,3392.01) 3335.2,3358.25 ; SWD1.3@3310,3385 cw(c3302.99,3350.76) 3336.75,3359.8 ; SWD1.3@3310,3385 ccw(c3344.24,3392.01) 3335.2,3358.25 ; SWD1.3@3310,3385 cw(c3302.99,3350.76) 3336.75,3359.8 ; SWD1.3@3310,3385 ccw(c3344.24,3392.01) 3335.2,3358.25 ; SWD1.3@3310,3385 cw(c3302.99,3350.76) 3336.75,3359.8 ; SWD1.3@3310,3385 ccw(c3344.24,3392.01) 3335.2,3358.25 ; SWD1.3@3310,3385 cw(c3302.99,3350.76) 3336.75,3359.8 ; SWD1.3@3310,3385 ccw(c3344.24,3392.01) 3335.2,3358.25 ; SWD1.3@3310,3385 cw(c3302.99,3350.76) 3336.75,3359.8 ; SWD1.3@3310,3385 ccw(c3344.24,3392.01) 3335.2,3358.25 ; SWD1.3@3310,3385 cw(c3302.99,3350.76) 3336.75,3359.8 ; SWD1.3@3330,3385 ccw(c3378.28,3385) 3344.14,3350.86 ; SWD1.3@3330,3385 ccw(c3378.28,3385) 3344.14,3350.86 ; SWD1.3@3330,3385 ccw(c3378.28,3385) 3344.14,3350.86 ; SWD1.3@3330,3385 ccw(c3378.28,3385) 3344.14,3350.86 ; SWD1.3@3330,3385 ccw(c3378.28,3385) 3344.14,3350.86 ; SWD1.3@3330,3385 ccw(c3378.28,3385) 3344.14,3350.86 ; SWD1.3@3330,3385 ccw(c3378.28,3385) 3344.14,3350.86 ; SWD1.3@3330,3385 ccw(c3378.28,3385) 3344.14,3350.86
PA15: STM32F103ZET6.110
PB0: P?.18 STM32F103ZET6.46 | length 1666.1
  Top Layer w10: STM32F103ZET6.46@4122.32,4090 4122.32,4262.32 4140,4280 v1(4140,4330) ; v1@4136.46,4326.46 cw(c4127.93,4317.93) 4140,4317.93 ; v1@4136.46,4326.46 cw(c4127.93,4317.93) 4140,4317.93 ; v1@4136.46,4326.46 cw(c4127.93,4317.93) 4140,4317.93 ; v1@4136.46,4326.46 cw(c4127.93,4317.93) 4140,4317.93 ; 4140,4317.93 cw(c4152.07,4317.93) v1@4143.54,4326.46 ; 4140,4317.93 cw(c4152.07,4317.93) v1@4143.54,4326.46 ; 4140,4317.93 cw(c4152.07,4317.93) v1@4143.54,4326.46 ; 4140,4317.93 cw(c4152.07,4317.93) v1@4143.54,4326.46
  Bottom Layer w10: v1(4140,4330) 4140,4605 4190,4655 4190,4745 P?.18@4235,4790 ; v1@4136.46,4333.54 ccw(c4127.93,4342.07) 4140,4342.07 ; v1@4136.46,4333.54 ccw(c4127.93,4342.07) 4140,4342.07 ; v1@4136.46,4333.54 ccw(c4127.93,4342.07) 4140,4342.07 ; v1@4136.46,4333.54 ccw(c4127.93,4342.07) 4140,4342.07 ; 4140,4342.07 ccw(c4152.07,4342.07) v1@4143.54,4333.54 ; 4140,4342.07 ccw(c4152.07,4342.07) v1@4143.54,4333.54 ; 4140,4342.07 ccw(c4152.07,4342.07) v1@4143.54,4333.54 ; 4140,4342.07 ccw(c4152.07,4342.07) v1@4143.54,4333.54 ; 4200.86,4755.86 cw(c4235,4721.72) P?.18@4235,4770 ; 4200.86,4755.86 ccw(c4166.72,4790) P?.18@4215,4790 ; 4200.86,4755.86 ccw(c4166.72,4790) P?.18@4215,4790 ; 4200.86,4755.86 cw(c4235,4721.72) P?.18@4235,4770 ; 4200.86,4755.86 ccw(c4166.72,4790) P?.18@4215,4790 ; 4200.86,4755.86 cw(c4235,4721.72) P?.18@4235,4770 ; 4200.86,4755.86 ccw(c4166.72,4790) P?.18@4215,4790 ; 4200.86,4755.86 cw(c4235,4721.72) P?.18@4235,4770 ; 4208.25,4764.8 cw(c4242.01,4755.76) P?.18@4235,4790 ; 4208.25,4764.8 cw(c4242.01,4755.76) P?.18@4235,4790 ; 4208.25,4764.8 cw(c4242.01,4755.76) P?.18@4235,4790 ; 4208.25,4764.8 cw(c4242.01,4755.76) P?.18@4235,4790 ; 4208.25,4764.8 cw(c4242.01,4755.76) P?.18@4235,4790 ; 4208.25,4764.8 cw(c4242.01,4755.76) P?.18@4235,4790 ; 4209.8,4763.25 ccw(c4200.76,4797.01) P?.18@4235,4790 ; 4209.8,4763.25 ccw(c4200.76,4797.01) P?.18@4235,4790 ; 4209.8,4763.25 ccw(c4200.76,4797.01) P?.18@4235,4790 ; 4209.8,4763.25 ccw(c4200.76,4797.01) P?.18@4235,4790 ; 4209.8,4763.25 ccw(c4200.76,4797.01) P?.18@4235,4790 ; 4209.8,4763.25 ccw(c4200.76,4797.01) P?.18@4235,4790
PB1: P?.11 STM32F103ZET6.47 | length 1175.8
  Top Layer w10: STM32F103ZET6.47@4102.64,4090 4102.64,4282.64 v1(4115,4295) ; 4106.46,4286.46 cw(c4115,4277.93) v1@4115,4290 ; 4106.46,4286.46 ccw(c4097.93,4295) v1@4110,4295 ; 4106.46,4286.46 ccw(c4097.93,4295) v1@4110,4295 ; 4106.46,4286.46 cw(c4115,4277.93) v1@4115,4290 ; 4106.46,4286.46 ccw(c4097.93,4295) v1@4110,4295 ; 4106.46,4286.46 cw(c4115,4277.93) v1@4115,4290 ; 4106.46,4286.46 ccw(c4097.93,4295) v1@4110,4295 ; 4106.46,4286.46 cw(c4115,4277.93) v1@4115,4290
  Bottom Layer w10: P?.11@3935,4690 3935,4495 4020,4410 4090,4410 4115,4385 v1(4115,4295) ; P?.11@3920.86,4675.86 cw(c3886.72,4641.72) 3935,4641.72 ; P?.11@3920.86,4675.86 cw(c3886.72,4641.72) 3935,4641.72 ; P?.11@3920.86,4675.86 cw(c3886.72,4641.72) 3935,4641.72 ; P?.11@3920.86,4675.86 cw(c3886.72,4641.72) 3935,4641.72 ; 3935,4641.72 cw(c3983.28,4641.72) P?.11@3949.14,4675.86 ; 3935,4641.72 cw(c3983.28,4641.72) P?.11@3949.14,4675.86 ; 3935,4641.72 cw(c3983.28,4641.72) P?.11@3949.14,4675.86 ; 3935,4641.72 cw(c3983.28,4641.72) P?.11@3949.14,4675.86 ; v1@4111.46,4298.54 ccw(c4102.93,4307.07) 4115,4307.07 ; v1@4111.46,4298.54 ccw(c4102.93,4307.07) 4115,4307.07 ; v1@4111.46,4298.54 ccw(c4102.93,4307.07) 4115,4307.07 ; v1@4111.46,4298.54 ccw(c4102.93,4307.07) 4115,4307.07 ; 4115,4307.07 ccw(c4127.07,4307.07) v1@4118.54,4298.54 ; 4115,4307.07 ccw(c4127.07,4307.07) v1@4118.54,4298.54 ; 4115,4307.07 ccw(c4127.07,4307.07) v1@4118.54,4298.54 ; 4115,4307.07 ccw(c4127.07,4307.07) v1@4118.54,4298.54
PB3: STM32F103ZET6.133
PB4: STM32F103ZET6.134
PB5: STM32F103ZET6.135
PB6: STM32F103ZET6.136
PB7: STM32F103ZET6.137
PB8: STM32F103ZET6.139
PB10: P?.9 STM32F103ZET6.69 | length 1602.2
  Top Layer w10: v1(3652.35,4267.65) 3669.57,4250.43 STM32F103ZET6.69@3669.57,4090 ; v1@3652.35,4262.65 cw(c3652.35,4250.58) 3660.88,4259.12 ; v1@3652.35,4262.65 cw(c3652.35,4250.58) 3660.88,4259.12 ; v1@3652.35,4262.65 cw(c3652.35,4250.58) 3660.88,4259.12 ; v1@3652.35,4262.65 cw(c3652.35,4250.58) 3660.88,4259.12 ; v1@3657.35,4267.65 ccw(c3669.42,4267.65) 3660.88,4259.12 ; v1@3657.35,4267.65 ccw(c3669.42,4267.65) 3660.88,4259.12 ; v1@3657.35,4267.65 ccw(c3669.42,4267.65) 3660.88,4259.12 ; v1@3657.35,4267.65 ccw(c3669.42,4267.65) 3660.88,4259.12
  Bottom Layer w10: v1(3652.35,4267.65) 3652.35,4507.35 P?.9@3835,4690 ; v1@3648.81,4271.19 ccw(c3640.28,4279.72) 3652.35,4279.72 ; v1@3648.81,4271.19 ccw(c3640.28,4279.72) 3652.35,4279.72 ; v1@3648.81,4271.19 ccw(c3640.28,4279.72) 3652.35,4279.72 ; v1@3648.81,4271.19 ccw(c3640.28,4279.72) 3652.35,4279.72 ; 3652.35,4279.72 ccw(c3664.42,4279.72) v1@3655.88,4271.19 ; 3652.35,4279.72 ccw(c3664.42,4279.72) v1@3655.88,4271.19 ; 3652.35,4279.72 ccw(c3664.42,4279.72) v1@3655.88,4271.19 ; 3652.35,4279.72 ccw(c3664.42,4279.72) v1@3655.88,4271.19 ; 3800.86,4655.86 cw(c3835,4621.72) P?.9@3835,4670 ; 3800.86,4655.86 ccw(c3766.72,4690) P?.9@3815,4690 ; 3800.86,4655.86 ccw(c3766.72,4690) P?.9@3815,4690 ; 3800.86,4655.86 cw(c3835,4621.72) P?.9@3835,4670 ; 3800.86,4655.86 ccw(c3766.72,4690) P?.9@3815,4690 ; 3800.86,4655.86 cw(c3835,4621.72) P?.9@3835,4670 ; 3800.86,4655.86 ccw(c3766.72,4690) P?.9@3815,4690 ; 3800.86,4655.86 cw(c3835,4621.72) P?.9@3835,4670 ; 3808.25,4664.8 cw(c3842.01,4655.76) P?.9@3835,4690 ; 3808.25,4664.8 cw(c3842.01,4655.76) P?.9@3835,4690 ; 3808.25,4664.8 cw(c3842.01,4655.76) P?.9@3835,4690 ; 3808.25,4664.8 cw(c3842.01,4655.76) P?.9@3835,4690 ; 3808.25,4664.8 cw(c3842.01,4655.76) P?.9@3835,4690 ; 3808.25,4664.8 cw(c3842.01,4655.76) P?.9@3835,4690 ; 3809.8,4663.25 ccw(c3800.76,4697.01) P?.9@3835,4690 ; 3809.8,4663.25 ccw(c3800.76,4697.01) P?.9@3835,4690 ; 3809.8,4663.25 ccw(c3800.76,4697.01) P?.9@3835,4690 ; 3809.8,4663.25 ccw(c3800.76,4697.01) P?.9@3835,4690 ; 3809.8,4663.25 ccw(c3800.76,4697.01) P?.9@3835,4690 ; 3809.8,4663.25 ccw(c3800.76,4697.01) P?.9@3835,4690
PB11: P?.7 STM32F103ZET6.70 | length 1629.1
  Top Layer w10: v1(3560,4264) 3649.88,4174.12 STM32F103ZET6.70@3649.88,4090 ; v1@3560,4259 cw(c3560,4246.93) 3568.54,4255.46 ; v1@3560,4259 cw(c3560,4246.93) 3568.54,4255.46 ; v1@3560,4259 cw(c3560,4246.93) 3568.54,4255.46 ; v1@3560,4259 cw(c3560,4246.93) 3568.54,4255.46 ; v1@3565,4264 ccw(c3577.07,4264) 3568.54,4255.46 ; v1@3565,4264 ccw(c3577.07,4264) 3568.54,4255.46 ; v1@3565,4264 ccw(c3577.07,4264) 3568.54,4255.46 ; v1@3565,4264 ccw(c3577.07,4264) 3568.54,4255.46
  Bottom Layer w10: v1(3560,4264) 3560,4515 P?.7@3735,4690 ; v1@3556.46,4267.54 ccw(c3547.93,4276.07) 3560,4276.07 ; v1@3556.46,4267.54 ccw(c3547.93,4276.07) 3560,4276.07 ; v1@3556.46,4267.54 ccw(c3547.93,4276.07) 3560,4276.07 ; v1@3556.46,4267.54 ccw(c3547.93,4276.07) 3560,4276.07 ; 3560,4276.07 ccw(c3572.07,4276.07) v1@3563.54,4267.54 ; 3560,4276.07 ccw(c3572.07,4276.07) v1@3563.54,4267.54 ; 3560,4276.07 ccw(c3572.07,4276.07) v1@3563.54,4267.54 ; 3560,4276.07 ccw(c3572.07,4276.07) v1@3563.54,4267.54 ; 3700.86,4655.86 cw(c3735,4621.72) P?.7@3735,4670 ; 3700.86,4655.86 ccw(c3666.72,4690) P?.7@3715,4690 ; 3700.86,4655.86 ccw(c3666.72,4690) P?.7@3715,4690 ; 3700.86,4655.86 cw(c3735,4621.72) P?.7@3735,4670 ; 3700.86,4655.86 ccw(c3666.72,4690) P?.7@3715,4690 ; 3700.86,4655.86 cw(c3735,4621.72) P?.7@3735,4670 ; 3700.86,4655.86 ccw(c3666.72,4690) P?.7@3715,4690 ; 3700.86,4655.86 cw(c3735,4621.72) P?.7@3735,4670 ; 3708.25,4664.8 cw(c3742.01,4655.76) P?.7@3735,4690 ; 3708.25,4664.8 cw(c3742.01,4655.76) P?.7@3735,4690 ; 3708.25,4664.8 cw(c3742.01,4655.76) P?.7@3735,4690 ; 3708.25,4664.8 cw(c3742.01,4655.76) P?.7@3735,4690 ; 3708.25,4664.8 cw(c3742.01,4655.76) P?.7@3735,4690 ; 3708.25,4664.8 cw(c3742.01,4655.76) P?.7@3735,4690 ; 3709.8,4663.25 ccw(c3700.76,4697.01) P?.7@3735,4690 ; 3709.8,4663.25 ccw(c3700.76,4697.01) P?.7@3735,4690 ; 3709.8,4663.25 ccw(c3700.76,4697.01) P?.7@3735,4690 ; 3709.8,4663.25 ccw(c3700.76,4697.01) P?.7@3735,4690 ; 3709.8,4663.25 ccw(c3700.76,4697.01) P?.7@3735,4690 ; 3709.8,4663.25 ccw(c3700.76,4697.01) P?.7@3735,4690
PB13: RF1.5 STM32F103ZET6.74 | length 1723.7
  Top Layer w10: v1(3105,4390) 3105,4345.25 3455.45,3994.8 STM32F103ZET6.74@3535,3994.8 ; v1@3101.46,4386.46 cw(c3092.93,4377.93) 3105,4377.93 ; v1@3101.46,4386.46 cw(c3092.93,4377.93) 3105,4377.93 ; v1@3101.46,4386.46 cw(c3092.93,4377.93) 3105,4377.93 ; v1@3101.46,4386.46 cw(c3092.93,4377.93) 3105,4377.93 ; 3105,4377.93 cw(c3117.07,4377.93) v1@3108.54,4386.46 ; 3105,4377.93 cw(c3117.07,4377.93) v1@3108.54,4386.46 ; 3105,4377.93 cw(c3117.07,4377.93) v1@3108.54,4386.46 ; 3105,4377.93 cw(c3117.07,4377.93) v1@3108.54,4386.46
  Bottom Layer w10: v1(3105,4390) 3055,4390 RF1.5@2960,4485 ; RF1.5@2960,4465 cw(c2960,4416.72) 2994.14,4450.86 ; RF1.5@2960,4465 cw(c2960,4416.72) 2994.14,4450.86 ; RF1.5@2960,4465 cw(c2960,4416.72) 2994.14,4450.86 ; RF1.5@2960,4465 cw(c2960,4416.72) 2994.14,4450.86 ; RF1.5@2960,4485 ccw(c2994.24,4492.01) 2985.2,4458.25 ; RF1.5@2960,4485 ccw(c2994.24,4492.01) 2985.2,4458.25 ; RF1.5@2960,4485 ccw(c2994.24,4492.01) 2985.2,4458.25 ; RF1.5@2960,4485 cw(c2952.99,4450.76) 2986.75,4459.8 ; RF1.5@2960,4485 cw(c2952.99,4450.76) 2986.75,4459.8 ; RF1.5@2960,4485 cw(c2952.99,4450.76) 2986.75,4459.8 ; RF1.5@2960,4485 cw(c2952.99,4450.76) 2986.75,4459.8 ; RF1.5@2960,4485 ccw(c2994.24,4492.01) 2985.2,4458.25 ; RF1.5@2960,4485 cw(c2952.99,4450.76) 2986.75,4459.8 ; RF1.5@2960,4485 cw(c2952.99,4450.76) 2986.75,4459.8 ; RF1.5@2960,4485 ccw(c2994.24,4492.01) 2985.2,4458.25 ; RF1.5@2960,4485 ccw(c2994.24,4492.01) 2985.2,4458.25 ; RF1.5@2980,4485 ccw(c3028.28,4485) 2994.14,4450.86 ; RF1.5@2980,4485 ccw(c3028.28,4485) 2994.14,4450.86 ; RF1.5@2980,4485 ccw(c3028.28,4485) 2994.14,4450.86 ; RF1.5@2980,4485 ccw(c3028.28,4485) 2994.14,4450.86 ; 3092.93,4390 cw(c3092.93,4377.93) v1@3101.46,4386.46 ; 3092.93,4390 ccw(c3092.93,4402.07) v1@3101.46,4393.54 ; 3092.93,4390 ccw(c3092.93,4402.07) v1@3101.46,4393.54 ; 3092.93,4390 cw(c3092.93,4377.93) v1@3101.46,4386.46 ; 3092.93,4390 ccw(c3092.93,4402.07) v1@3101.46,4393.54 ; 3092.93,4390 cw(c3092.93,4377.93) v1@3101.46,4386.46 ; 3092.93,4390 ccw(c3092.93,4402.07) v1@3101.46,4393.54 ; 3092.93,4390 cw(c3092.93,4377.93) v1@3101.46,4386.46
PC1: P?.36 STM32F103ZET6.27 | length 2150.5
  Top Layer w10: STM32F103ZET6.27@4375,3837.32 4377.69,3840.01 4430.26,3840.01 4537,3946.75 4537,4219.12 4955.88,4638 4956.54,4638 4958.54,4640 5040,4640 5085,4685 5085,4740 P?.36@5135,4790 ; STM32F103ZET6.27@4396.71,3836.62 cw(c4404.9,3828.43) 4404.9,3840.01 ; STM32F103ZET6.27@4396.71,3836.62 cw(c4404.9,3828.43) 4404.9,3840.01 ; STM32F103ZET6.27@4396.71,3836.62 cw(c4404.9,3828.43) 4404.9,3840.01 ; STM32F103ZET6.27@4396.71,3836.62 cw(c4404.9,3828.43) 4404.9,3840.01 ; 5100.86,4755.86 cw(c5135,4721.72) P?.36@5135,4770 ; 5100.86,4755.86 ccw(c5066.72,4790) P?.36@5115,4790 ; 5100.86,4755.86 ccw(c5066.72,4790) P?.36@5115,4790 ; 5100.86,4755.86 cw(c5135,4721.72) P?.36@5135,4770 ; 5100.86,4755.86 ccw(c5066.72,4790) P?.36@5115,4790 ; 5100.86,4755.86 cw(c5135,4721.72) P?.36@5135,4770 ; 5100.86,4755.86 ccw(c5066.72,4790) P?.36@5115,4790 ; 5100.86,4755.86 cw(c5135,4721.72) P?.36@5135,4770 ; 5108.25,4764.8 cw(c5142.01,4755.76) P?.36@5135,4790 ; 5108.25,4764.8 cw(c5142.01,4755.76) P?.36@5135,4790 ; 5108.25,4764.8 cw(c5142.01,4755.76) P?.36@5135,4790 ; 5108.25,4764.8 cw(c5142.01,4755.76) P?.36@5135,4790 ; 5108.25,4764.8 cw(c5142.01,4755.76) P?.36@5135,4790 ; 5108.25,4764.8 cw(c5142.01,4755.76) P?.36@5135,4790 ; 5109.8,4763.25 ccw(c5100.76,4797.01) P?.36@5135,4790 ; 5109.8,4763.25 ccw(c5100.76,4797.01) P?.36@5135,4790 ; 5109.8,4763.25 ccw(c5100.76,4797.01) P?.36@5135,4790 ; 5109.8,4763.25 ccw(c5100.76,4797.01) P?.36@5135,4790 ; 5109.8,4763.25 ccw(c5100.76,4797.01) P?.36@5135,4790 ; 5109.8,4763.25 ccw(c5100.76,4797.01) P?.36@5135,4790
PC2: P?.33 STM32F103ZET6.28 | length 1468
  Top Layer w10: STM32F103ZET6.28@4375,3857.01 4424.64,3857.01 4521,3953.37 4521,4225.75 4949.25,4654 4949.91,4654 4985.91,4690 P?.33@5035,4690 ; 4986.72,4690 cw(c4986.72,4641.72) P?.33@5020.86,4675.86 ; 4986.72,4690 ccw(c4986.72,4738.28) P?.33@5020.86,4704.14 ; 4986.72,4690 ccw(c4986.72,4738.28) P?.33@5020.86,4704.14 ; 4986.72,4690 cw(c4986.72,4641.72) P?.33@5020.86,4675.86 ; 4986.72,4690 ccw(c4986.72,4738.28) P?.33@5020.86,4704.14 ; 4986.72,4690 cw(c4986.72,4641.72) P?.33@5020.86,4675.86 ; 4986.72,4690 ccw(c4986.72,4738.28) P?.33@5020.86,4704.14 ; 4986.72,4690 cw(c4986.72,4641.72) P?.33@5020.86,4675.86
PC4: P?.22 STM32F103ZET6.44 | length 1731.6
  Top Layer w10: STM32F103ZET6.44@4161.69,4090 4161.69,4211.69 v1@4205,4255 ; 4195.76,4245.76 ccw(c4185.51,4256) v1@4200,4256 ; 4195.76,4245.76 ccw(c4185.51,4256) v1@4200,4256 ; 4195.76,4245.76 ccw(c4185.51,4256) v1@4200,4256 ; 4195.76,4245.76 ccw(c4185.51,4256) v1@4200,4256 ; 4198.17,4248.17 cw(c4205,4241.34) v1@4205,4251 ; 4198.17,4248.17 cw(c4205,4241.34) v1@4205,4251 ; 4198.17,4248.17 cw(c4205,4241.34) v1@4205,4251 ; 4198.17,4248.17 cw(c4205,4241.34) v1@4205,4251
  Bottom Layer w10: v1(4205,4256) 4205,4490 4385,4670 4385,4740 P?.22@4435,4790 ; v1@4201.46,4259.54 ccw(c4192.93,4268.07) 4205,4268.07 ; v1@4201.46,4259.54 ccw(c4192.93,4268.07) 4205,4268.07 ; v1@4201.46,4259.54 ccw(c4192.93,4268.07) 4205,4268.07 ; v1@4201.46,4259.54 ccw(c4192.93,4268.07) 4205,4268.07 ; 4205,4268.07 ccw(c4217.07,4268.07) v1@4208.54,4259.54 ; 4205,4268.07 ccw(c4217.07,4268.07) v1@4208.54,4259.54 ; 4205,4268.07 ccw(c4217.07,4268.07) v1@4208.54,4259.54 ; 4205,4268.07 ccw(c4217.07,4268.07) v1@4208.54,4259.54 ; 4400.86,4755.86 cw(c4435,4721.72) P?.22@4435,4770 ; 4400.86,4755.86 ccw(c4366.72,4790) P?.22@4415,4790 ; 4400.86,4755.86 ccw(c4366.72,4790) P?.22@4415,4790 ; 4400.86,4755.86 cw(c4435,4721.72) P?.22@4435,4770 ; 4400.86,4755.86 ccw(c4366.72,4790) P?.22@4415,4790 ; 4400.86,4755.86 cw(c4435,4721.72) P?.22@4435,4770 ; 4400.86,4755.86 ccw(c4366.72,4790) P?.22@4415,4790 ; 4400.86,4755.86 cw(c4435,4721.72) P?.22@4435,4770 ; 4408.25,4764.8 cw(c4442.01,4755.76) P?.22@4435,4790 ; 4408.25,4764.8 cw(c4442.01,4755.76) P?.22@4435,4790 ; 4408.25,4764.8 cw(c4442.01,4755.76) P?.22@4435,4790 ; 4408.25,4764.8 cw(c4442.01,4755.76) P?.22@4435,4790 ; 4408.25,4764.8 cw(c4442.01,4755.76) P?.22@4435,4790 ; 4408.25,4764.8 cw(c4442.01,4755.76) P?.22@4435,4790 ; 4409.8,4763.25 ccw(c4400.76,4797.01) P?.22@4435,4790 ; 4409.8,4763.25 ccw(c4400.76,4797.01) P?.22@4435,4790 ; 4409.8,4763.25 ccw(c4400.76,4797.01) P?.22@4435,4790 ; 4409.8,4763.25 ccw(c4400.76,4797.01) P?.22@4435,4790 ; 4409.8,4763.25 ccw(c4400.76,4797.01) P?.22@4435,4790 ; 4409.8,4763.25 ccw(c4400.76,4797.01) P?.22@4435,4790
PC5: P?.20 STM32F103ZET6.45 | length 1699.4
  Top Layer w10: STM32F103ZET6.45@4142.01,4090 4142.01,4237.01 v1(4165,4260) ; 4156.46,4251.46 cw(c4165,4242.93) v1@4165,4255 ; 4156.46,4251.46 ccw(c4147.93,4260) v1@4160,4260 ; 4156.46,4251.46 ccw(c4147.93,4260) v1@4160,4260 ; 4156.46,4251.46 cw(c4165,4242.93) v1@4165,4255 ; 4156.46,4251.46 ccw(c4147.93,4260) v1@4160,4260 ; 4156.46,4251.46 cw(c4165,4242.93) v1@4165,4255 ; 4156.46,4251.46 ccw(c4147.93,4260) v1@4160,4260 ; 4156.46,4251.46 cw(c4165,4242.93) v1@4165,4255
  Bottom Layer w10: v1(4165,4260) 4165,4565 4295,4695 4295,4750 P?.20@4335,4790 ; v1@4161.46,4263.54 ccw(c4152.93,4272.07) 4165,4272.07 ; v1@4161.46,4263.54 ccw(c4152.93,4272.07) 4165,4272.07 ; v1@4161.46,4263.54 ccw(c4152.93,4272.07) 4165,4272.07 ; v1@4161.46,4263.54 ccw(c4152.93,4272.07) 4165,4272.07 ; 4165,4272.07 ccw(c4177.07,4272.07) v1@4168.54,4263.54 ; 4165,4272.07 ccw(c4177.07,4272.07) v1@4168.54,4263.54 ; 4165,4272.07 ccw(c4177.07,4272.07) v1@4168.54,4263.54 ; 4165,4272.07 ccw(c4177.07,4272.07) v1@4168.54,4263.54 ; 4300.86,4755.86 cw(c4335,4721.72) P?.20@4335,4770 ; 4300.86,4755.86 ccw(c4266.72,4790) P?.20@4315,4790 ; 4300.86,4755.86 ccw(c4266.72,4790) P?.20@4315,4790 ; 4300.86,4755.86 cw(c4335,4721.72) P?.20@4335,4770 ; 4300.86,4755.86 ccw(c4266.72,4790) P?.20@4315,4790 ; 4300.86,4755.86 cw(c4335,4721.72) P?.20@4335,4770 ; 4300.86,4755.86 ccw(c4266.72,4790) P?.20@4315,4790 ; 4300.86,4755.86 cw(c4335,4721.72) P?.20@4335,4770 ; 4308.25,4764.8 cw(c4342.01,4755.76) P?.20@4335,4790 ; 4308.25,4764.8 cw(c4342.01,4755.76) P?.20@4335,4790 ; 4308.25,4764.8 cw(c4342.01,4755.76) P?.20@4335,4790 ; 4308.25,4764.8 cw(c4342.01,4755.76) P?.20@4335,4790 ; 4308.25,4764.8 cw(c4342.01,4755.76) P?.20@4335,4790 ; 4308.25,4764.8 cw(c4342.01,4755.76) P?.20@4335,4790 ; 4309.8,4763.25 ccw(c4300.76,4797.01) P?.20@4335,4790 ; 4309.8,4763.25 ccw(c4300.76,4797.01) P?.20@4335,4790 ; 4309.8,4763.25 ccw(c4300.76,4797.01) P?.20@4335,4790 ; 4309.8,4763.25 ccw(c4300.76,4797.01) P?.20@4335,4790 ; 4309.8,4763.25 ccw(c4300.76,4797.01) P?.20@4335,4790 ; 4309.8,4763.25 ccw(c4300.76,4797.01) P?.20@4335,4790
PC8: STM32F103ZET6.98
PC9: STM32F103ZET6.99
PC10: STM32F103ZET6.111
PC11: STM32F103ZET6.112
PC12: STM32F103ZET6.113
PD3: STM32F103ZET6.117
PD4: STM32F103ZET6.118
PD5: STM32F103ZET6.119
PD6: STM32F103ZET6.122
PD7: STM32F103ZET6.123
PD8: STM32F103ZET6.77
PD9: STM32F103ZET6.78
PD10: STM32F103ZET6.79
PD11: STM32F103ZET6.80
PD12: STM32F103ZET6.81
PD13: STM32F103ZET6.82
PD14: STM32F103ZET6.85
PE0: STM32F103ZET6.141
PE1: STM32F103ZET6.142
PE4: STM32F103ZET6.3
PE5: STM32F103ZET6.4
PE6: STM32F103ZET6.5
PF0: STM32F103ZET6.10
PF1: STM32F103ZET6.11
PF6: P?.26 STM32F103ZET6.18 | length 3992.8
  Top Layer w10: STM32F103ZET6.18@4375,3660.16 5290.16,3660.16 v1(5470,3840) ; 5461.46,3831.46 cw(c5470,3822.93) v1@5470,3835 ; 5461.46,3831.46 ccw(c5452.93,3840) v1@5465,3840 ; 5461.46,3831.46 ccw(c5452.93,3840) v1@5465,3840 ; 5461.46,3831.46 cw(c5470,3822.93) v1@5470,3835 ; 5461.46,3831.46 ccw(c5452.93,3840) v1@5465,3840 ; 5461.46,3831.46 cw(c5470,3822.93) v1@5470,3835 ; 5461.46,3831.46 ccw(c5452.93,3840) v1@5465,3840 ; 5461.46,3831.46 cw(c5470,3822.93) v1@5470,3835
  Bottom Layer w10: v1(5470,3840) 5470,4795 5335,4930 4775,4930 P?.26@4635,4790 ; P?.26@4635,4790 cw(c4669.24,4782.99) 4660.2,4816.75 ; P?.26@4635,4790 cw(c4669.24,4782.99) 4660.2,4816.75 ; P?.26@4635,4790 cw(c4669.24,4782.99) 4660.2,4816.75 ; P?.26@4635,4790 ccw(c4627.99,4824.24) 4661.75,4815.2 ; P?.26@4635,4790 ccw(c4627.99,4824.24) 4661.75,4815.2 ; P?.26@4635,4790 ccw(c4627.99,4824.24) 4661.75,4815.2 ; P?.26@4635,4790 ccw(c4627.99,4824.24) 4661.75,4815.2 ; P?.26@4635,4790 cw(c4669.24,4782.99) 4660.2,4816.75 ; P?.26@4635,4790 ccw(c4627.99,4824.24) 4661.75,4815.2 ; P?.26@4635,4790 ccw(c4627.99,4824.24) 4661.75,4815.2 ; P?.26@4635,4790 cw(c4669.24,4782.99) 4660.2,4816.75 ; P?.26@4635,4790 cw(c4669.24,4782.99) 4660.2,4816.75 ; P?.26@4635,4810 ccw(c4635,4858.28) 4669.14,4824.14 ; P?.26@4635,4810 ccw(c4635,4858.28) 4669.14,4824.14 ; P?.26@4635,4810 ccw(c4635,4858.28) 4669.14,4824.14 ; P?.26@4635,4810 ccw(c4635,4858.28) 4669.14,4824.14 ; P?.26@4655,4790 cw(c4703.28,4790) 4669.14,4824.14 ; P?.26@4655,4790 cw(c4703.28,4790) 4669.14,4824.14 ; P?.26@4655,4790 cw(c4703.28,4790) 4669.14,4824.14 ; P?.26@4655,4790 cw(c4703.28,4790) 4669.14,4824.14 ; v1@5466.46,3843.54 ccw(c5457.93,3852.07) 5470,3852.07 ; v1@5466.46,3843.54 ccw(c5457.93,3852.07) 5470,3852.07 ; v1@5466.46,3843.54 ccw(c5457.93,3852.07) 5470,3852.07 ; v1@5466.46,3843.54 ccw(c5457.93,3852.07) 5470,3852.07 ; 5470,3852.07 ccw(c5482.07,3852.07) v1@5473.54,3843.54 ; 5470,3852.07 ccw(c5482.07,3852.07) v1@5473.54,3843.54 ; 5470,3852.07 ccw(c5482.07,3852.07) v1@5473.54,3843.54 ; 5470,3852.07 ccw(c5482.07,3852.07) v1@5473.54,3843.54
PF7: P?.28 STM32F103ZET6.19 | length 3766.9
  Top Layer w10: STM32F103ZET6.19@4375,3679.84 5254.84,3679.84 v1(5415,3840) ; 5406.46,3831.46 cw(c5415,3822.93) v1@5415,3835 ; 5406.46,3831.46 ccw(c5397.93,3840) v1@5410,3840 ; 5406.46,3831.46 ccw(c5397.93,3840) v1@5410,3840 ; 5406.46,3831.46 cw(c5415,3822.93) v1@5415,3835 ; 5406.46,3831.46 ccw(c5397.93,3840) v1@5410,3840 ; 5406.46,3831.46 cw(c5415,3822.93) v1@5415,3835 ; 5406.46,3831.46 ccw(c5397.93,3840) v1@5410,3840 ; 5406.46,3831.46 cw(c5415,3822.93) v1@5415,3835
  Bottom Layer w10: v1(5415,3840) 5415,4810 5315,4910 4855,4910 P?.28@4735,4790 ; P?.28@4735,4790 ccw(c4727.99,4824.24) 4761.75,4815.2 ; P?.28@4735,4790 ccw(c4727.99,4824.24) 4761.75,4815.2 ; P?.28@4735,4790 ccw(c4727.99,4824.24) 4761.75,4815.2 ; P?.28@4735,4790 cw(c4769.24,4782.99) 4760.2,4816.75 ; P?.28@4735,4790 cw(c4769.24,4782.99) 4760.2,4816.75 ; P?.28@4735,4790 cw(c4769.24,4782.99) 4760.2,4816.75 ; P?.28@4735,4790 cw(c4769.24,4782.99) 4760.2,4816.75 ; P?.28@4735,4790 ccw(c4727.99,4824.24) 4761.75,4815.2 ; P?.28@4735,4790 cw(c4769.24,4782.99) 4760.2,4816.75 ; P?.28@4735,4790 cw(c4769.24,4782.99) 4760.2,4816.75 ; P?.28@4735,4790 ccw(c4727.99,4824.24) 4761.75,4815.2 ; P?.28@4735,4790 ccw(c4727.99,4824.24) 4761.75,4815.2 ; P?.28@4735,4810 ccw(c4735,4858.28) 4769.14,4824.14 ; P?.28@4735,4810 ccw(c4735,4858.28) 4769.14,4824.14 ; P?.28@4735,4810 ccw(c4735,4858.28) 4769.14,4824.14 ; P?.28@4735,4810 ccw(c4735,4858.28) 4769.14,4824.14 ; P?.28@4755,4790 cw(c4803.28,4790) 4769.14,4824.14 ; P?.28@4755,4790 cw(c4803.28,4790) 4769.14,4824.14 ; P?.28@4755,4790 cw(c4803.28,4790) 4769.14,4824.14 ; P?.28@4755,4790 cw(c4803.28,4790) 4769.14,4824.14 ; v1@5411.46,3843.54 ccw(c5402.93,3852.07) 5415,3852.07 ; v1@5411.46,3843.54 ccw(c5402.93,3852.07) 5415,3852.07 ; v1@5411.46,3843.54 ccw(c5402.93,3852.07) 5415,3852.07 ; v1@5411.46,3843.54 ccw(c5402.93,3852.07) 5415,3852.07 ; 5415,3852.07 ccw(c5427.07,3852.07) v1@5418.54,3843.54 ; 5415,3852.07 ccw(c5427.07,3852.07) v1@5418.54,3843.54 ; 5415,3852.07 ccw(c5427.07,3852.07) v1@5418.54,3843.54 ; 5415,3852.07 ccw(c5427.07,3852.07) v1@5418.54,3843.54
PF8: STM32F103ZET6.20
PF9: STM32F103ZET6.21
PF10: STM32F103ZET6.22
PG9: STM32F103ZET6.124
PG10: STM32F103ZET6.125
PG11: STM32F103ZET6.126
PG12: STM32F103ZET6.127
PG13: STM32F103ZET6.128
PG14: STM32F103ZET6.129
PG15: STM32F103ZET6.132